# Altium PCB SDM30.PcbDoc
Units mm, origin at the board's own origin, x right, y up, seen from the top; angles counter-clockwise.
Board outline 84 x 51 mm, 2 copper layers (Top Layer, Bottom Layer); 4 components, 5 nets, 19 pads, 0 vias.
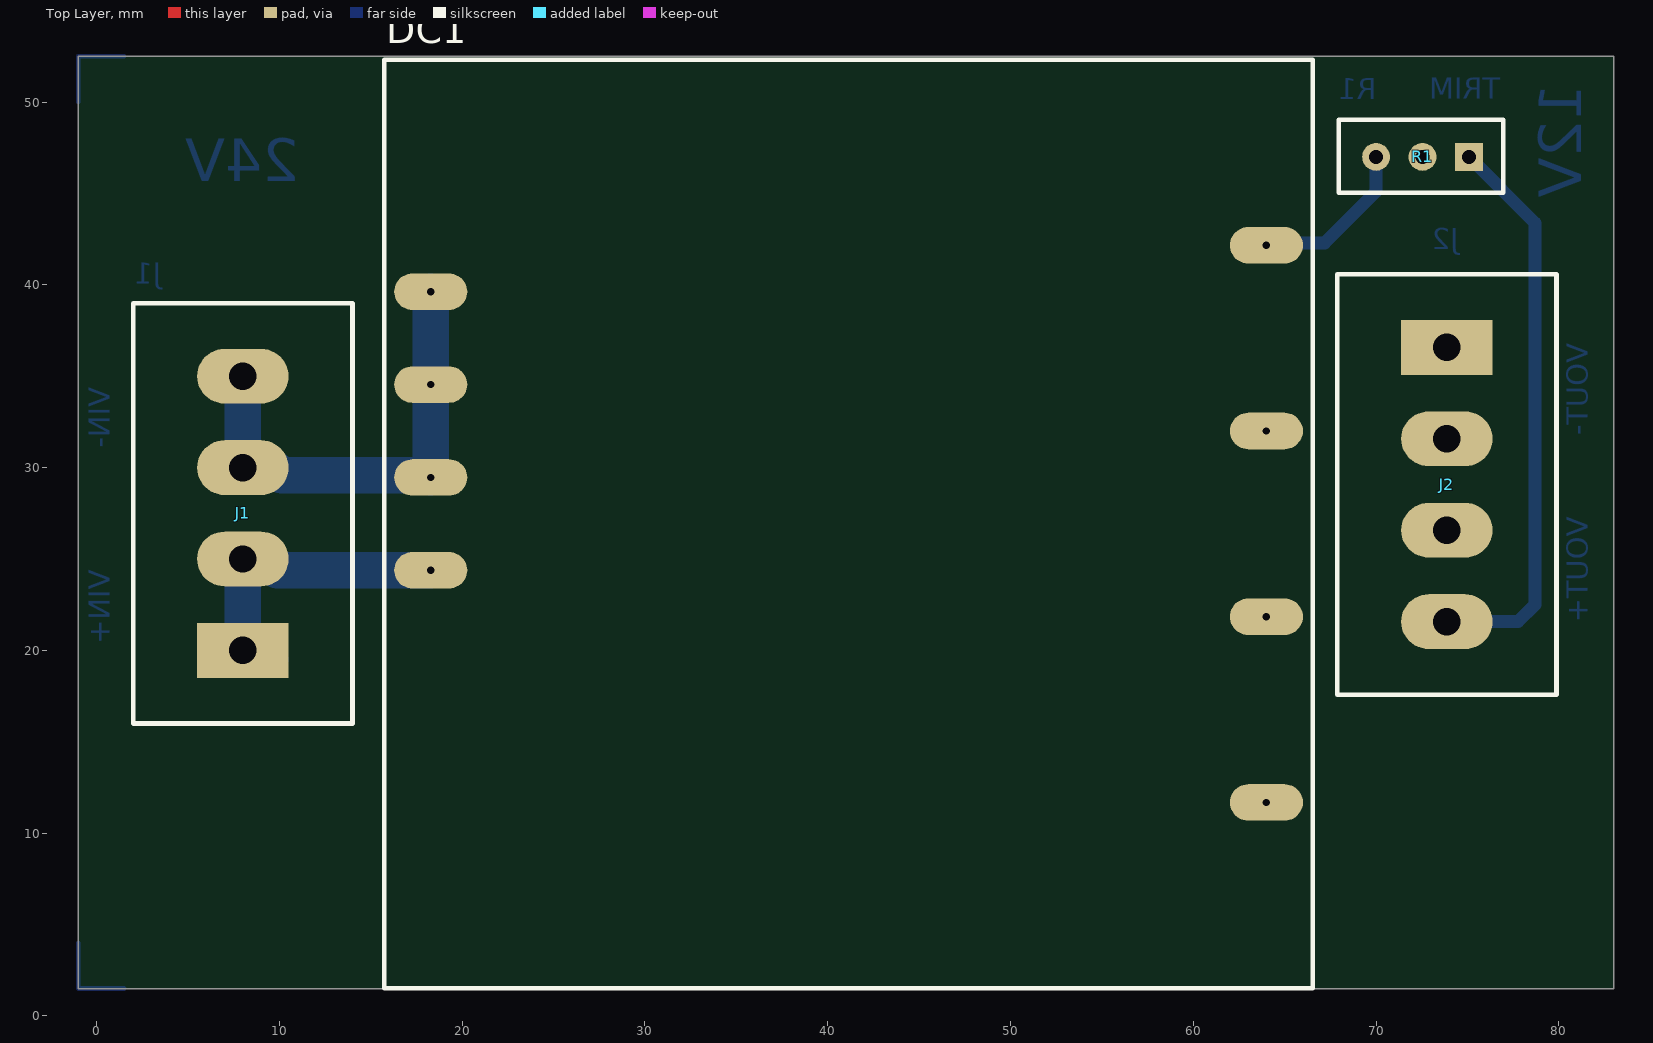
[diagram p0: Top Layer view]
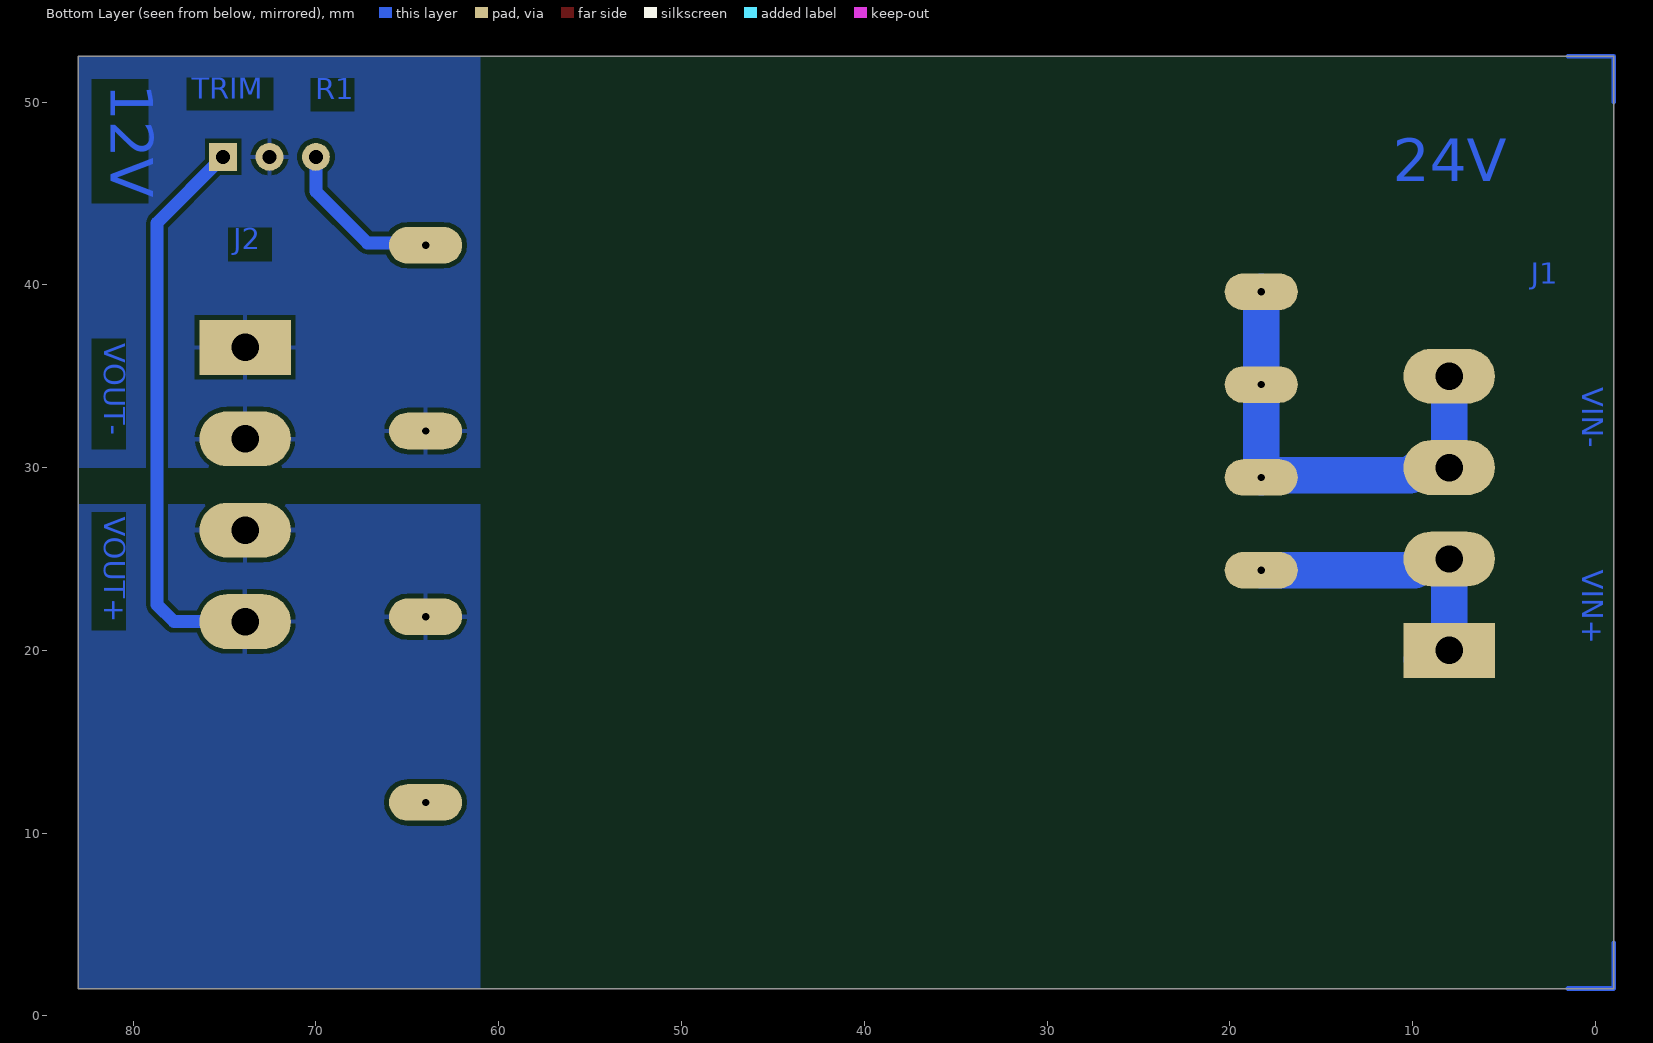
[diagram p1: Bottom Layer view, seen from below]

## Layer stack, top to bottom
Top Solder: solder mask 0.0102, Solder Resist, Dk 3.5
Top Layer: signal copper 0.0356
Dielectric 1: dielectric 0.32, FR-4, Dk 4.8
Bottom Layer: signal copper 0.0356
Bottom Solder: solder mask 0.0102, Solder Resist, Dk 3.5

## Board outline
-1,1.5 83,1.5 83,52.5 -1,52.5

## Design rules (kind name [scope] priority, off if disabled: settings)
Clearance [All] p1: gap=0.254 ignorepadtopadclearanceinfootprint=FALSE except(0: Arc-Hole Track-Hole SMDPad-Hole THPad-Hole Via-Hole Fill-Hole Poly-Hole Region-Hole Text-Hole)
PolygonConnect [All] p1: connectstyle=Relief reliefconductorwidth=0.254 reliefentries=4 polygonreliefangle="90 Angle" airgapwidth=0.254
RoutingVias [All] p1: holewidth=0.711 width=1.27 viastyle="Through Hole" minholewidth=0.711 minwidth=1.27 maxholewidth=0.711 maxwidth=1.27
SolderMaskExpansion [All] p1: expansion=0.102 istentingtop=FALSE
Width [All] p1: maxlimit=5 minlimit=0.254 preferedwidth=0.254
30 further rules are at their usual default settings.

## Components (designator, comment, footprint, x,y, rotation, side; value= is the part's Value field where it differs from the comment)
DC1 "SDM30-24S12" SDM30-24S12 66.54,1.52 r90 top
J1 "4 pin" "4 pin terminal 5 mm" 8,20 r90 top
J2 "4 pin" "4 pin terminal 5 mm" 73.873,36.573 r270 top
R1 "10k" "3 pin header" 75.08,47 r180 top

## Footprints (in the part's own frame and the unit in brackets; to place one, negate y for a bottom-side part, rotate by r counter-clockwise, add the part's x,y. Pads: shape width x height; smd on the part's side, far side on the other; paste and mask are expansions set on the pad)
"3 pin header" [mil]
  rect 60x60 hole 30: 1(0,0)
  round 60 hole 30: 2(100,0) 3(200,0)
  silkscreen extent -74,-80 280,77
"4 pin terminal 5 mm" [mm]
  rect 3x5 hole 1.5: 1(0,0)
  oval 3x5 hole 1.5: 2(5,0) 3(10,0) 4(15,0)
  silkscreen extent -4,-6 19,6
SDM30-24S12 [mm] "SDM30-24S12"
  oval 2x4 hole 0.4: 1(22.86,48.26) 2(27.94,48.26) 3(33.02,48.26) 4(38.1,48.26) 5(10.16,2.54) 6(20.32,2.54) 7(30.48,2.54) 8(40.64,2.54)
  silkscreen extent 0,0 50.8,50.8

## Part data
DC1: "Isolated DC/DC Converters - Through Hole 30W 24Vin 12Vout 2.5A", Manufacturer="Mean Well", Part Number=SDM30-24S12
J1 J2: library part TERMINAL_BLOCK_5mm_4pin
R1: library part RES_POT_THT_generic

## Nets (pads, with @x,y where several pads share a name; then routed paths per layer and width w, separated by ;. In a path a pad name is that pad's centre, name@x,y a point inside that pad or via, vN(x,y) a via of type N, cw(c..) or ccw(c..) an arc to the next point about the centre after c; other vN are vias at no path point)
TRIM: DC1.8 R1.3 | length 9.2
  Bottom Layer w0.7: DC1.8@63.873,42.287 67.187,42.287 70,45.1 R1.3
VIN+: DC1.1 J1.1 J1.2 | length 17.2
  Bottom Layer w2: J1.1@9.5,19.5 9,20 J1.1 J1.2 9.271,25 9.891,24.38 DC1.1
VIN-: DC1.2 DC1.3 DC1.4 J1.3 J1.4 | length 25.5
  Bottom Layer w2: J1.4 J1.3 8.191,29.809 9.898,29.809 10.12,29.587 DC1.2@18.153,29.587 ; DC1.2 DC1.3 DC1.4
VOUT+: DC1.6 J2.3 J2.4 R1.1 | length 31.2
  Bottom Layer w0.7: J2.4 77.773,21.573 78.7,22.5 78.7,43.38 R1.1
VOUT-: DC1.7 J2.1 J2.2 R1.2
pads on no net: DC1.5
copper on no net: | length 10
  Bottom Layer w0.254: -1,4 -1,1.5 1.5,1.5 ; -1,50 -1,52.5 1.5,52.5

## Polygon pours and split planes (outlines as drawn)
VOUT+ on Bottom Layer "VOUT+_L02_P003" (solid, pour order 3): 83,28 61,28 61,1.5 83,1.5
VOUT- on Bottom Layer "VOUT-_L02_P002" (solid, pour order 2): 83,52.5 61,52.5 61,30 83,30

## Other copper
Bottom Layer:
  text "12V" at 82,51 h4 r90
  text "TRIM" at 76.8,49.8 h2
  text "24V" at 11.1,44.9 h4
  text "VOUT-" at 81.976,36.8 h2 r90
  text "VIN-" at 1.1,34.4 h2 r90
  text "VOUT+" at 81.976,27.3 h2 r90
  text "VIN+" at 1.1,24.4 h2 r90